# Altium PCB JLink_ARM-OB_072_Pcb.PcbDoc
Units mm, origin at the board's own origin, x right, y up, seen from the top; angles counter-clockwise.
Board outline 26.7 x 11.81 mm, 2 copper layers (Top Layer, Bottom Layer); 23 components, 24 nets, 108 pads, 20 vias.
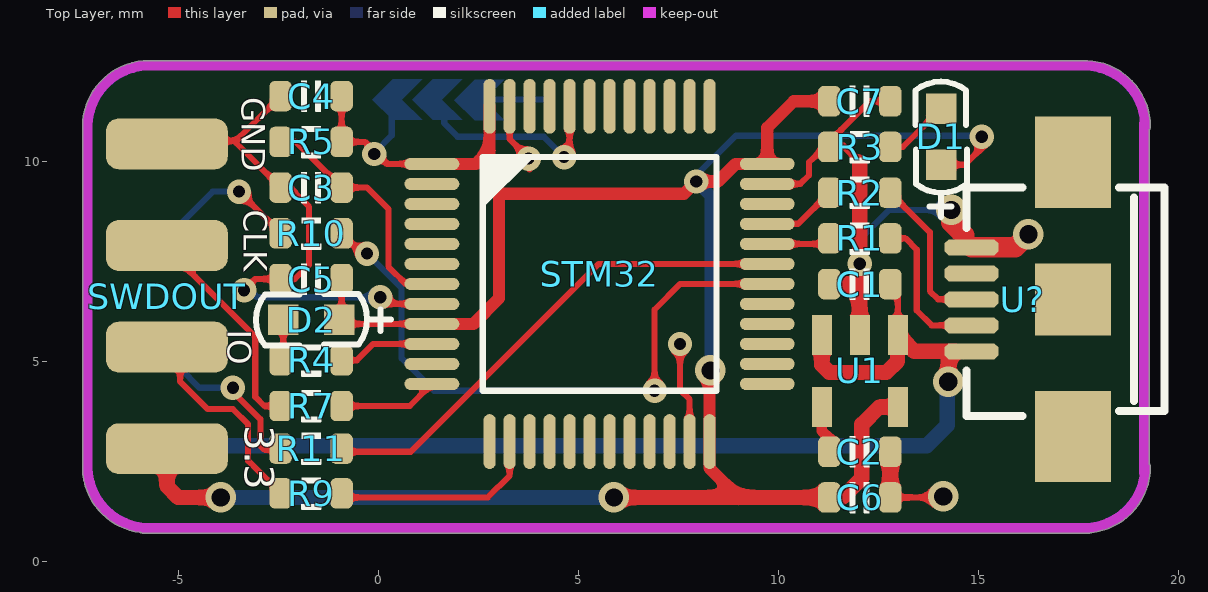
[diagram p0: Top Layer view]
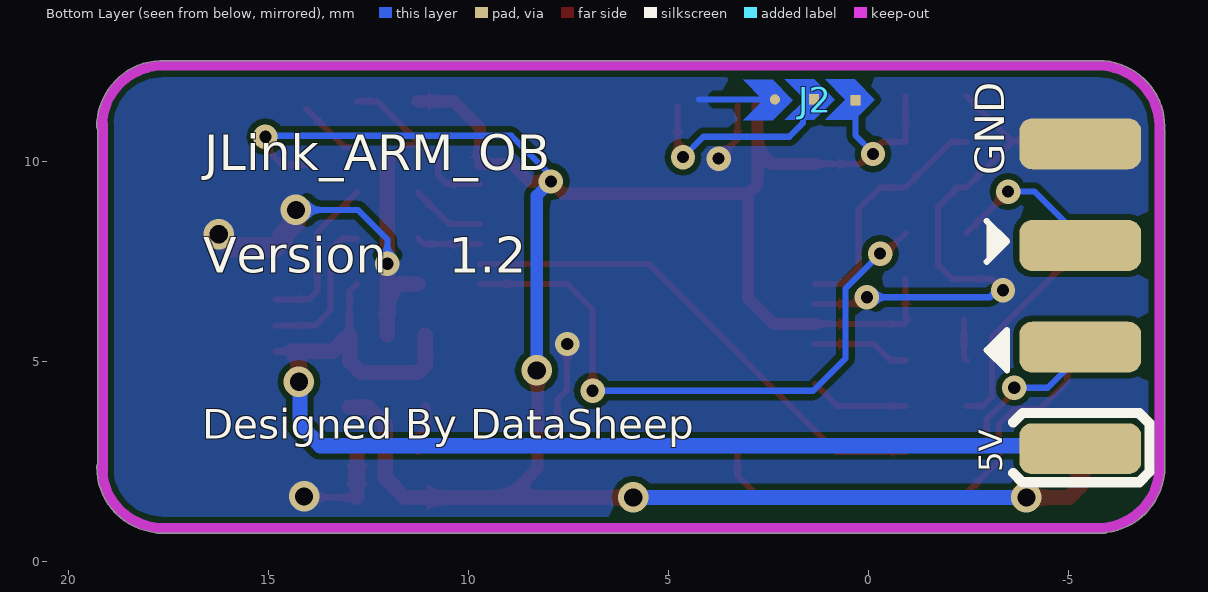
[diagram p1: Bottom Layer view, seen from below]
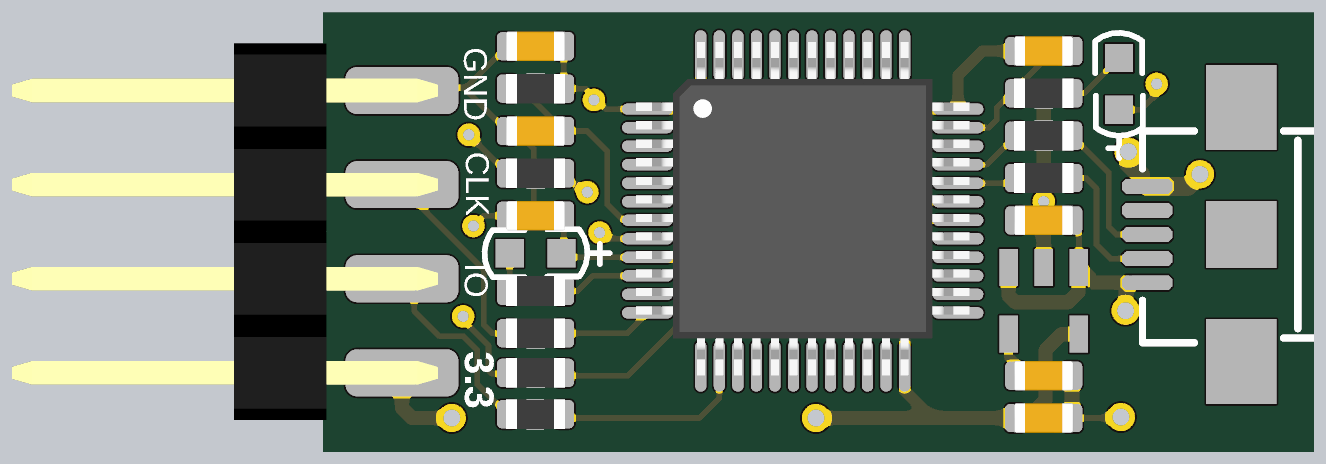
[diagram p2: 3D render of the assembled board from above, using the file's embedded part models]

## Layer stack, top to bottom
Top Solder: solder mask 0.0102, Solder Resist, Dk 3.5
Top Layer: signal copper 0.0356
Dielectric 1: dielectric 0.32, FR-4, Dk 4.8
Bottom Layer: signal copper 0.0356
Bottom Solder: solder mask 0.0102, Solder Resist, Dk 3.5

## Board outline
-7.378,2.153 ccw(c-5.74,2.362) -5.949,0.724 ccw(c-5.893,0.838) -5.893,0.711 17.78,0.711 ccw(c17.78,0.838) 17.828,0.72 ccw(c17.653,2.362) 19.304,2.362 ccw(c19.177,2.362) 19.279,2.439 19.279,10.795 ccw(c19.177,10.871) 19.304,10.871 ccw(c17.653,10.871) 17.723,12.521 ccw(c17.704,12.395) 17.704,12.523 -5.664,12.523 ccw(c-5.664,12.395) -5.702,12.517 ccw(c-5.74,12.395) -5.74,12.523 ccw(c-5.74,10.871) -7.392,10.871 ccw(c-7.264,10.871) -7.386,10.833 ccw(c-7.264,10.795) -7.392,10.795 -7.392,2.21 ccw(c-7.264,2.21)

## Design rules (kind name [scope] priority, off if disabled: settings)
Clearance ClearancePolygon [InPolygon] p1: gap=0.152 ignorepadtopadclearanceinfootprint=FALSE except(0: Arc-Hole Track-Hole SMDPad-Hole THPad-Hole Via-Hole Fill-Hole Poly-Hole Region-Hole Text-Hole)
Clearance [All] p2: gap=0.152 ignorepadtopadclearanceinfootprint=FALSE except(0: Arc-Hole Track-Hole SMDPad-Hole THPad-Hole Via-Hole Fill-Hole Poly-Hole Region-Hole Text-Hole)
ComponentClearance [All] p1: gap=0 collisioncheckmode=3 verticalgap=0 showdistances=FALSE
Height [All] p1: minheight=0 maxheight=127 prefheight=12.7
HoleSize [All] p1: absolutevalues=TRUE maxlimit=5.08 minlimit=0.025 maxpercent=80.000 minpercent=20.000
HoleToHoleClearance [All] p1: gap=0.152 allowstackedmicrovias=TRUE
MinimumSolderMaskSliver [All] p1: minsoldermaskwidth=0
PolygonConnect [All] p1: connectstyle=Direct reliefconductorwidth=0.254 reliefentries=4 polygonreliefangle="90 Angle" airgapwidth=0.254
RoutingVias [All] p1: holewidth=0.305 width=0.61 viastyle="Through Hole" minholewidth=0.305 minwidth=0.508 maxholewidth=0.711 maxwidth=1.27
SilkToSilkClearance [All] p1: silktosilkclearance=0
SilkToSolderMaskClearance [IsPad] p1: minsilkscreentomaskgap=0 clearancetoexposedcopper=TRUE
SolderMaskExpansion [All] p1: expansion=0.051
Width [All] p1: maxlimit=1.27 minlimit=0.152 preferedwidth=0.152
23 further rules are at their usual default settings.

## Components (designator, comment, footprint, x,y, rotation, side; value= is the part's Value field where it differs from the comment)
C1 "Cap_0603" CAP_0603 12.04,6.934 r0 top
C2 "Cap_0603" CAP_0603 12.04,2.743 r180 top
C3 "Cap_0603" CAP_0603 -1.676,9.347 r0 top
C4 "Cap_0603" CAP_0603 -1.676,11.633 r0 top
C5 "Cap_0603" CAP_0603 -1.676,7.061 r0 top
C6 "Cap_0603" CAP_0603 12.04,1.6 r180 top
C7 "Cap_0603" CAP_0603 12.04,11.506 r180 top
D1 "LED_0603" 0603/LED 14.072,10.617 r270 top
D2 "LED_0603" 0603/LED -1.676,6.045 r0 top
J2 "测试点" test 0.429,9.52 r0 bottom
R1 "Res_0603" RES_0603 12.04,8.077 r180 top
R2 "Res_0603" RES_0603 12.04,9.22 r180 top
R3 "Res_0603" RES_0603 12.04,10.363 r0 top
R4 "Res_0603" RES_0603 -1.676,5.029 r180 top
R5 "Res_0603" RES_0603 -1.676,10.49 r0 top
R7 "Res_0603" RES_0603 -1.676,3.886 r0 top
R9 "Res_0603" RES_0603 -1.676,1.702 r0 top
R10 "Res_0603" RES_0603 -1.676,8.204 r0 top
R11 "Res_0603" RES_0603 -1.676,2.819 r0 top
STM32 "STM32F103C" LQFP_P0.5_48 5.535,7.188 r0 top locked
SWDOUT "HDR2x4_2.54" HDR2X4_2.54_180H -5.283,2.819 r180 top locked
U1 "MIC5219" SOT23-5 12.99,5.664 r180 top
U? "USB-Micro" USB_MICRO 17.374,6.553 r90 top

## Footprints (in the part's own frame and the unit in brackets; to place one, negate y for a bottom-side part, rotate by r counter-clockwise, add the part's x,y. Pads: shape width x height; smd on the part's side, far side on the other; paste and mask are expansions set on the pad)
0603/LED [mil] "贴片0603"
  rect 30x30 smd: 1(27.5,0) 2(-27.5,0)
  silkscreen extent -54,-25 79,25
CAP_0603 [mil]
  rrect50% 22x30 smd: 1(-30,0) 2(30,0)
  silkscreen extent -10,-15 10,15, body extent -31,-16 31,16, height 31
HDR2X4_2.54_180H [mil]
  rrect50% 120x50 smd: 1(0,0) 3(0,-100) 5(0,-200) 7(0,-300)
  rrect50% 120x50 smd far side: 2(0,0) 4(0,-100) 6(0,-200) 8(0,-300)
  body extent -38,-350 415,50, height 100
LQFP_P0.5_48 [mil]
  oval 54x12 smd: 1(-165,108.27) 2(-165,88.58) 3(-165,68.9) 4(-165,49.21) 5(-165,29.53) 6(-165,9.84) 7(-165,-9.84) 8(-165,-29.53) 9(-165,-49.21) 10(-165,-68.9) 11(-165,-88.58) 12(-165,-108.27) 25(165,-108.27) 26(165,-88.58) 27(165,-68.9) 28(165,-49.21) 29(165,-29.53) 30(165,-9.84) 31(165,9.84) 32(165,29.53) 33(165,49.21) 34(165,68.9) 35(165,88.58) 36(165,108.27)
  oval 12x54 smd: 13(-108.27,-165) 14(-88.58,-165) 15(-68.9,-165) 16(-49.21,-165) 17(-29.53,-165) 18(-9.84,-165) 19(9.84,-165) 20(29.53,-165) 21(49.21,-165) 22(68.9,-165) 23(88.58,-165) 24(108.27,-165) 37(108.27,165) 38(88.58,165) 39(68.9,165) 40(49.21,165) 41(29.53,165) 42(9.84,165) 43(-9.84,165) 44(-29.53,165) 45(-49.21,165) 46(-68.9,165) 47(-88.58,165) 48(-108.27,165)
  silkscreen extent -115,-115 115,115, body extent -177,-175 177,180, height 61
RES_0603 [mil]
  rrect50% 22x30 smd: 1(-30,0) 2(30,0)
  silkscreen extent -10,-16 10,16, body extent -31,-16 31,16, height 18
SOT23-5 [mm]
  rect 0.5x1 smd: 1(0,0) 2(0.95,0) 3(1.9,0) 4(0,1.8) 5(1.9,1.8)
test [mil]
  rect 10x10 smd: 1(-3.54,-79.13) 2(37.12,-80.2)
  round 10 smd: 3(75.69,-79.96)
  Top Layer region: -22.77,-79.77 -2.77,-99.77 26.23,-99.77 6.23,-79.77 26.23,-59.77 -2.77,-59.77
  Top Layer region: 16.83,-79.76 36.83,-99.76 65.83,-99.76 45.83,-79.76 65.83,-59.76 36.83,-59.76
  Top Layer region: 57.97,-79.3 77.97,-99.3 106.97,-99.3 86.97,-79.3 106.97,-59.3 77.97,-59.3
USB_MICRO [mm] "USB方孔"
  oct 0.4x1.35 smd: 1(-1.3,2.54) 2(-0.65,2.54) 3(0,2.54) 4(0.65,2.54) 5(1.3,2.54)
  rect 2.286x1.9 smd: 6(3.429,0) 7(-3.429,0)
  rect 1.8x1.9 smd: 8(0,0)
  silkscreen extent -2.92,-2.29 2.79,2.67

## Part data
C1 C2 C3 C4 C5 C6 C7: "Capacitor"
D1 D2: "LED"
R1 R2 R3 R4 R5 R7 R9 R10 R11: "Resistor"
STM32: "MCU"
SWDOUT: "Header"
U?: "USB接口"

## Via types
v1: diameter 0.61, hole 0.305, Top Layer to Bottom Layer, 13 vias
v2: diameter 0.762, hole 0.457, Top Layer to Bottom Layer, 7 vias

## Nets (pads, with @x,y where several pads share a name; then routed paths per layer and width w, separated by ;. In a path a pad name is that pad's centre, name@x,y a point inside that pad or via, vN(x,y) a via of type N, cw(c..) or ccw(c..) an arc to the next point about the centre after c; other vN are vias at no path point)
3V3: C4.2 C5.2 C6.2 C7.2 D1.1 D2.1 J2.1 R5.2 STM32.1 STM32.9 STM32.24 STM32.36 STM32.48 SWDOUT.1 U1.4 | length 66.2
  Top Layer w0.152: SWDOUT.1@-4.953,2.896 SWDOUT.1@-4.216,2.896 ; C5.2 -0.914,6.109 D2.1 -0.871,5.938 STM32.9 ; C4.2 R5.2 -0.33,10.49 0.222,9.938 STM32.1 ; 3.023,9.169 3.023,9.195 ; D1.1 14.668,9.919 15.088,10.338 v1(15.088,10.617)
  Top Layer w0.305: STM32.9 2.382,5.938 3.023,6.579 3.023,9.169 ; STM32.1 2.445,9.938 2.785,10.278 ; STM32.48 2.785,10.278 ; v2(8.306,4.775) 8.285,4.754 STM32.24 8.285,2.333 9.017,1.6 ; C7.2 10.389,11.506 9.726,10.843 STM32.36 8.93,9.938 8.492,9.5 v1(7.95,9.5) 7.645,9.195 3.023,9.195 2.785,9.433 2.785,10.278
  Top Layer w0.381: SWDOUT.1 -5.283,1.88 -5.004,1.6 v2(-3.937,1.6) ; v2(5.893,1.6) 9.017,1.6 C6.2 11.608,1.6 12.09,2.083 12.09,3.429 12.526,3.864 U1.4
  Bottom Layer w0.152: v2@-3.988,1.651 v2(-3.937,1.6) ; v1@-0.076,10.236 0.339,10.651 J2.1 ; v1(7.95,9.5) 7.95,9.652 8.941,10.643 v1@15.215,10.643 ; v2@8.306,4.724 v2(8.306,4.775)
  Bottom Layer w0.305: v1(7.95,9.5) 8.306,9.144 v2(8.306,4.775)
  Bottom Layer w0.381: v2(-3.937,1.6) v2(5.893,1.6)
  other v1: -0.102,10.185
BOOT0: J2.2 STM32.44 | length 5.3
  Top Layer w0.152: v1@4.674,10.16 4.785,10.271 STM32.44
  Bottom Layer w0.152: J2.2 1.651,11.278 1.651,10.956 1.981,10.626 1.981,10.617 4.14,10.617 v1(4.648,10.109)
GND: C1.1 C2.1 C3.1 C4.1 C5.1 C6.1 C7.1 J2.3 R3.1 STM32.8 STM32.23 STM32.35 STM32.47 SWDOUT.7 SWDOUT.8 U1.2 U?.5 | length 39
  Top Layer w0.152: SWDOUT.7 -5.207,10.516 -3.556,10.516 ; v1(-3.353,6.782) -3.073,7.061 C5.1 -2.083,7.061 -1.727,7.417 -1.727,8.865 -2.21,9.347 C3.1 -3.556,10.465 -3.556,10.516 ; C4.1 -3.556,10.516 ; v1@0.076,6.629 v1(0.051,6.604) 0.217,6.438 STM32.8 ; STM32.47 3.285,10.558 3.759,10.084 v1(3.759,10.071) 3.746,10.071 3.632,9.957 v1@3.785,9.804 ; v1(7.544,5.436) v1@7.544,5.182 ; v1@7.697,5.336 v1@7.544,5.182 ; STM32.23 7.785,4.052 7.544,4.293 v1@7.544,5.182 ; STM32.35 10.556,9.438 10.77,9.652 10.77,9.982 R3.1@11.201,10.414 ; 12.04,9.982 11.608,10.414 R3.1@11.201,10.414 ; C6.1 v2@14.021,1.6 ; C7.1 12.294,11.506 R3.1@11.201,10.414 ; v2@14.326,8.484 v2(14.326,8.788) ; U?.5@14.656,8.031 U?.5
  Top Layer w0.381: C1.1 11.76,6.934 12.04,6.655 ; U1.2 12.04,6.655 ; 12.04,9.982 v1(12.04,7.442) 12.04,6.655 ; C6.1 C2.1
  Top Layer w0.508: v2@14.326,8.484 14.656,8.153 U?.5@14.656,8.031 ; U?.5 15.93,7.853 v2(16.256,8.179)
  Bottom Layer w0.152: v1@-3.15,6.731 -3.023,6.604 v1(0.051,6.604) ; J2.3 4.242,11.551 ; v1(12.04,7.442) 12.04,8.052 12.776,8.788 v2(14.326,8.788)
  other v2: 14.122,1.626
ISWCLK: STM32.37
ISWDIO: STM32.34
LED: R4.1 STM32.10 | length 2.4
  Top Layer w0.152: R4.1 -0.533,5.029 -0.124,5.438 STM32.10
NetC2_2: C2.2 U1.5 | length 1.2
  Top Layer w0.152: C2.2 C2.2@11.278,3.073
  Top Layer w0.254: U1.5 11.09,3.261 C2.2@11.278,3.073
NetD1_2: D1.2 R3.2 | length 1.7
  Top Layer w0.152: R3.2 13.119,10.363 D1.2
NetD2_2: D2.2 R4.2 | length 1
  Top Layer w0.152: R4.2 -2.375,5.093 D2.2
NetR1_1: R1.1 U?.2 | length 3.8
  Top Layer w0.152: R1.1 13.183,8.077 13.462,7.798 13.462,6.274 13.833,5.903 U?.2
NetR2_1: R2.1 U?.3 | length 4
  Top Layer w0.152: R2.1 13.792,8.23 13.792,6.756 13.995,6.553 U?.3
NetR7_2: R7.2 STM32.12 | length 2.5
  Top Layer w0.152: R7.2 0.792,3.886 STM32.12
NetR9_2: R9.2 STM32.14 | length 5.3
  Top Layer w0.152: R9.2@-0.914,1.6 2.743,1.6 3.285,2.142 STM32.14
NetR10_2: R10.2 STM32.30 | length 15.6
  Top Layer w0.152: R10.2 -0.406,7.696 v1(-0.279,7.696) ; v1(6.909,4.267) 6.909,6.299 7.548,6.938 STM32.30
  Bottom Layer w0.152: v1(-0.279,7.696) -0.279,7.689 0.584,6.825 0.584,5.08 1.397,4.267 v1(6.909,4.267)
NetR11_2: R11.2 STM32.31 | length 12.6
  Top Layer w0.152: R11.2@-0.914,2.743 0.813,2.743 5.508,7.438 STM32.31
RST: C3.2 R5.1 STM32.7 | length 6.1
  Top Layer w0.152: R5.1 -2.057,10.49 C3.2 -0.279,9.347 0.254,8.814 0.254,7.366 0.682,6.938 STM32.7
TRX: R11.1 SWDOUT.4 | length 4.5
  Top Layer w0.152: v1@-3.733,4.343 -2.946,3.557 -2.946,2.896 -2.845,2.794 R11.1@-2.438,2.794
  Bottom Layer w0.152: SWDOUT.4@-4.953,5.436 -4.953,4.826 -4.47,4.343 v1(-3.632,4.343)
TSWC: R7.1 SWDOUT.5 | length 5.4
  Top Layer w0.152: SWDOUT.5@-4.953,7.976 -4.953,7.493 -3.073,5.613 -3.073,4.115 -2.845,3.886 R7.1
TSWD: R9.1 SWDOUT.3 | length 5.2
  Top Layer w0.152: SWDOUT.3 -4.953,5.029 -4.953,4.496 -4.267,3.81 -3.631,3.81 -3.251,3.43 -3.251,2.515 R9.1
TSWO: STM32.13
TTX: R10.1 SWDOUT.6 | length 3.7
  Top Layer w0.152: v1(-3.48,9.246) R10.1
  Bottom Layer w0.152: SWDOUT.6@-4.953,7.976 -4.953,8.433 -4.14,9.246 v1(-3.48,9.246)
USB_DM: R1.2 STM32.32 | length 1.6
  Top Layer w0.152: STM32.32 11.139,7.938 R1.2
USB_DP: R2.2 STM32.33 | length 1.9
  Top Layer w0.152: STM32.33 10.496,8.438 R2.2
VUSB: C1.2 SWDOUT.2 U1.1 U1.3 U?.1 | length 28.1
  Top Layer w0.152: C1.2 12.99,6.746 U1.1 U1.1@12.979,5.654 ; U?.1@14.249,5.08 14.423,5.253 U?.1
  Top Layer w0.381: U1.3 11.09,4.912 11.278,4.724 12.7,4.724 12.979,5.004 U1.1@12.979,5.654 ; U1.1 13.401,5.253 U?.1@14.423,5.253 ; v2(14.249,4.496) U?.1@14.249,5.08
  Bottom Layer w0.381: SWDOUT.2@-4.953,2.896 13.716,2.896 14.224,3.404 v2@14.224,4.445
pads on no net: STM32.2 STM32.3 STM32.4 STM32.5 STM32.6 STM32.11 STM32.15 STM32.16 STM32.17 STM32.18 STM32.19 STM32.20 STM32.21 STM32.22 STM32.25 STM32.26 STM32.27 STM32.28 STM32.29 STM32.38 STM32.39 STM32.40 STM32.41 STM32.42 STM32.43 STM32.45 STM32.46 U?.4 U?.6 U?.7 U?.8

## Polygon pours and split planes (outlines as drawn)
GND on Bottom Layer "GND" (solid, remove dead copper, pour order 4): -8.865,14.834 -8.56,14.529 -8.56,-0.66 21.311,-0.66 21.641,-0.33 20.599,0.711 20.599,13.335

## Keep-outs
Keep-Out Layer:
  lines w0.254: -7.264,2.21 -7.264,10.795 ; -7.264,2.362 ccw(c-5.74,2.362) -5.74,0.838 ; -7.264,10.871 cw(c-5.74,10.871) -5.74,12.395 ; -5.893,0.838 17.78,0.838 ; -5.664,12.395 17.704,12.395 ; 17.653,0.838 ccw(c17.653,2.362) 19.177,2.362 ; 17.653,12.395 cw(c17.653,10.871) 19.177,10.871 ; 19.152,2.21 19.152,10.947

## Silkscreen, mask and mechanical layers (free items; w line width, h text height)
Top Overlay:
  text "GND" at -3.607,11.608 h1.02 r270
  text "CLK" at -3.556,8.788 h1.02 r270
  text "IO" at -2.972,5.791 h1.02 r90
  text "3.3" at -3.581,3.404 h1.27 r270
Bottom Overlay:
  region: -2.946,5.283 -3.454,5.791 -3.454,4.775
  region: -3.454,8.001 -2.946,7.493 -2.946,8.509
  lines w0.152: -2.946,7.493 -3.454,8.001 -2.946,8.509 ; -3.454,4.775 -3.454,5.791 -2.946,5.283 -3.454,4.775
  lines w0.254: -3.607,2.21 -3.835,1.981 -6.756,1.981 -7.01,2.235 -7.01,3.454 -6.756,3.708 -3.835,3.708 -3.607,3.48
  text "GND" at -3.632,9.652 h1.27 r270
  text "JLink_ARM_OB" at 16.612,9.474 h1.52
  text "Version    1.2" at 16.637,6.918 h1.52
  text "Designed By DataSheep" at 16.662,2.819 h1.27
  text "5V" at -3.531,2.235 h1.02 r270
Bottom Solder:
  drawing of 870 lines, arcs and shapes, not listed